# Altium PCB Copy of LineFollower.PcbDoc
Units mm, origin at the board's own origin, x right, y up, seen from the top; angles counter-clockwise.
Board outline 60 x 100.7 mm, 2 copper layers (Top Layer, Bottom Layer); 38 components, 53 nets, 184 pads, 3 vias.
Unrouted connection lines stored in the file: 54.
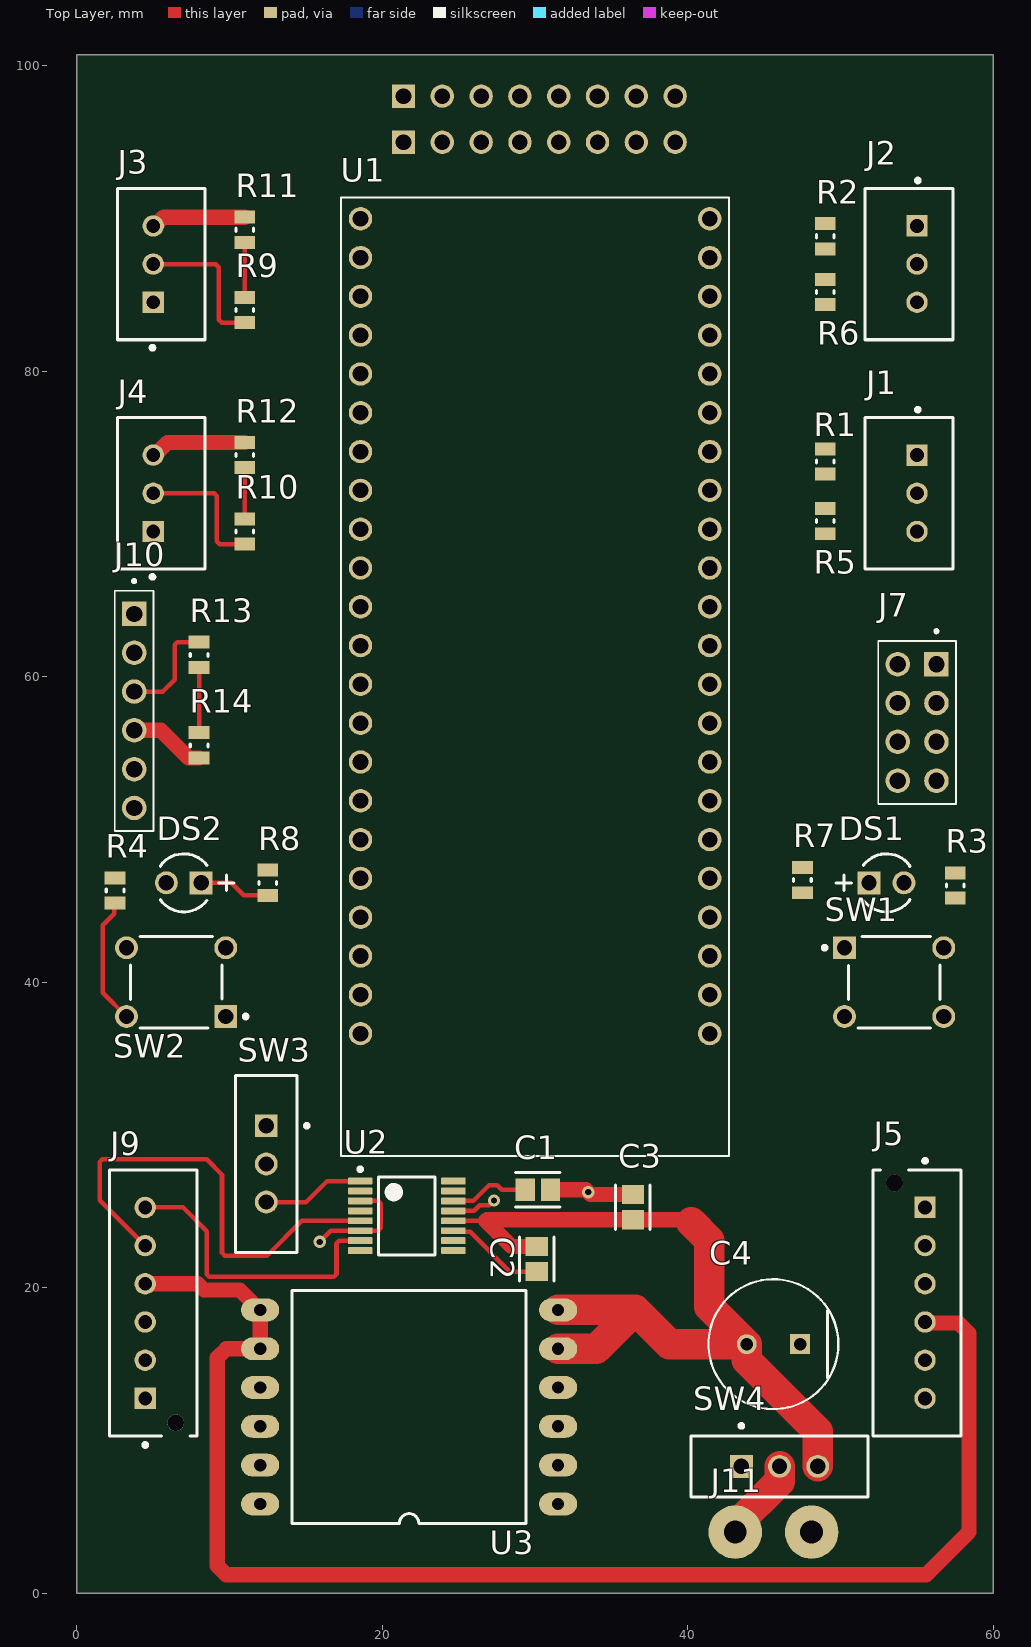
[diagram p0: Top Layer view]
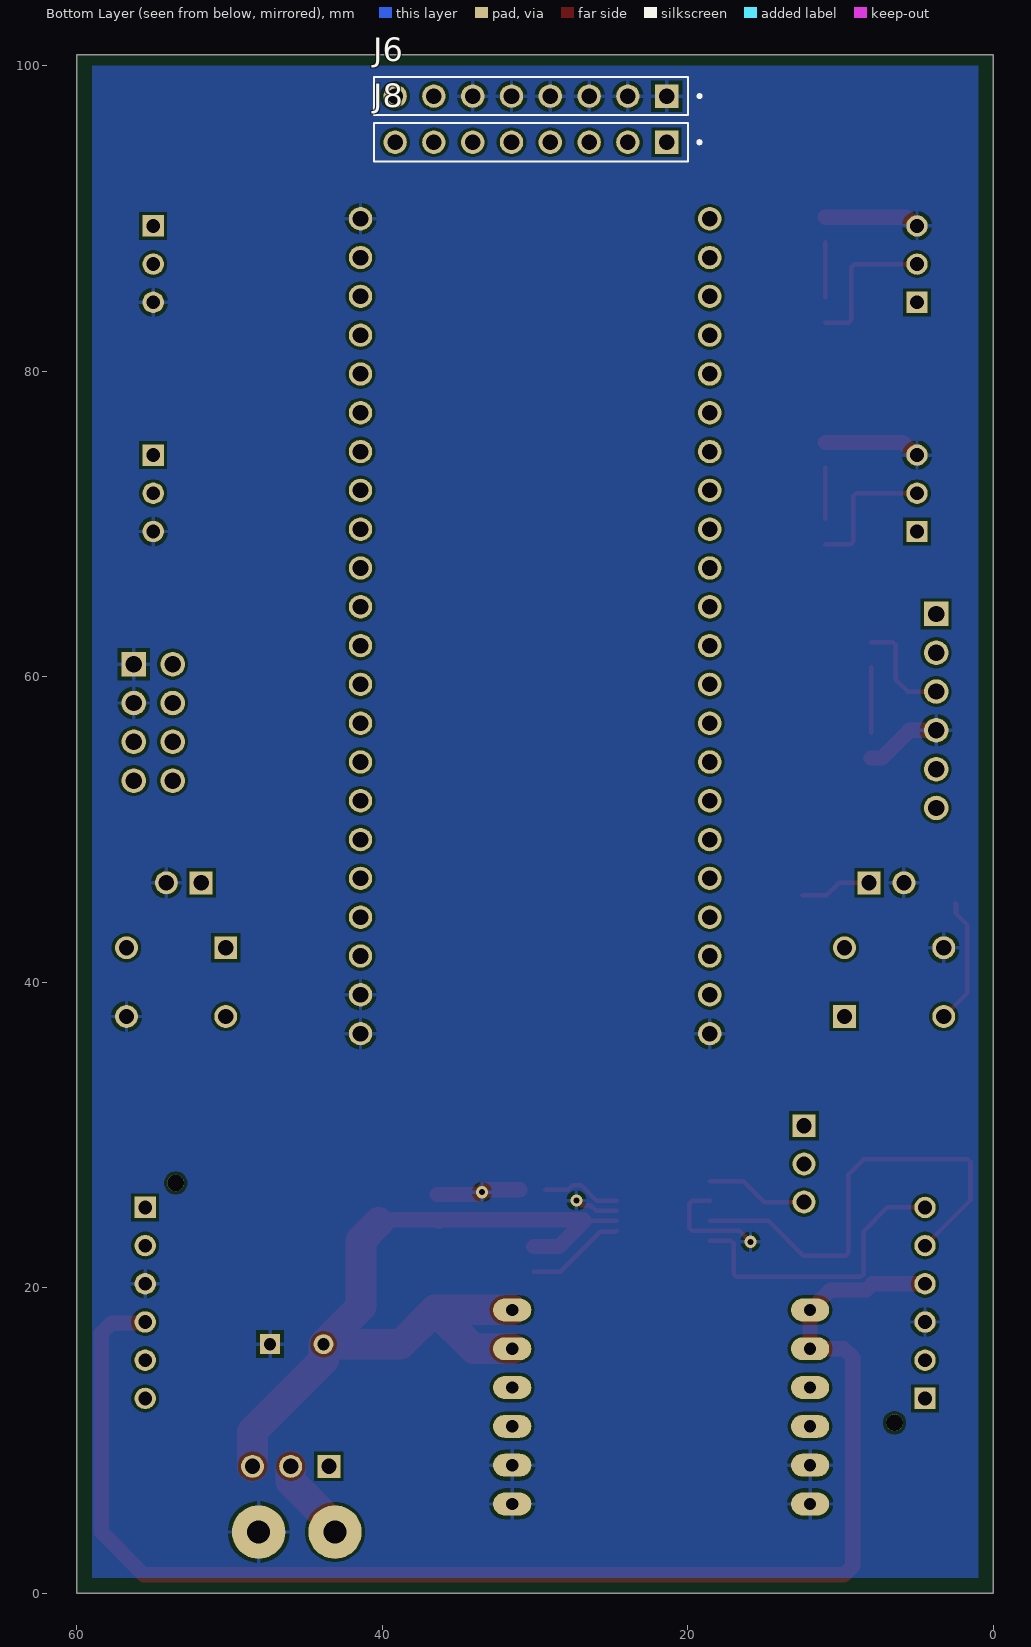
[diagram p1: Bottom Layer view, seen from below]

## Layer stack, top to bottom
Top Solder: solder mask 0.0102, Solder Resist, Dk 3.5
Top Layer: signal copper 0.0356
Dielectric 1: dielectric 0.32, FR-4, Dk 4.8
Bottom Layer: signal copper 0.0356
Bottom Solder: solder mask 0.0102, Solder Resist, Dk 3.5

## Board outline
0,0 60,0 60,100.7 0,100.7

## Design rules (kind name [scope] priority, off if disabled: settings)
Clearance [All] p1: gap=0.2 ignorepadtopadclearanceinfootprint=TRUE
PolygonConnect [All] p1: connectstyle=Relief reliefconductorwidth=0.254 reliefentries=4 polygonreliefangle="90 Angle" airgapwidth=0.254
RoutingVias [All] p1: holewidth=0.4 width=0.8 viastyle="Through Hole" minholewidth=0.4 minwidth=0.8 maxholewidth=0.4 maxwidth=0.8
SolderMaskExpansion [All] p1: expansion=0.102 istentingtop=FALSE
SupplyNets "Schematic Supply Nets_3" [InNet('3V3')] p1: voltage=0.000
SupplyNets "Schematic Supply Nets_2" [InNet('GND')] p2: voltage=0.000
SupplyNets "Schematic Supply Nets_1" [InNet('VBAT')] p3: voltage=0.000
SupplyNets "Schematic Supply Nets" [InNet('VCC')] p4: voltage=0.000
Width [All] p1: maxlimit=2.5 minlimit=0.254 preferedwidth=0.4
30 further rules are at their usual default settings.

## Components (designator, comment, footprint, x,y, rotation, side; value= is the part's Value field where it differs from the comment)
C1 "2.2uF 10V" FP-CL21-IPC_B 30.174,26.4 r0 top
C2 "0.01uF 25V" FP-CL21-IPC_B 30.1,21.874 r90 top
C3 "10uF 25V" FP-CL21-IPC_B 36.4,25.274 r270 top
C4 "EEUTA1E101" FP-RAD-TH-D_8_0_5-L_11_5-MFG 45.6,16.3 r180 top
DS1 "304090040" LED-2P-2.28-3MM 53,46.5 r0 top
DS2 "304090040" LED-2P-2.28-3MM 7,46.5 r180 top
J1 "B3B-XH-A" FP-B3B-XH-A_LF_SN-MFG 54.475,72 r270 top
J2 "B3B-XH-A" FP-B3B-XH-A_LF_SN-MFG 54.475,87 r270 top
J3 "B3B-XH-A" FP-B3B-XH-A_LF_SN-MFG 5.525,87 r90 top
J4 "B3B-XH-A" FP-B3B-XH-A_LF_SN-MFG 5.525,72 r90 top
J5 "B6B-XH-AM" FP-B6B-XH-AM_LF_SN-MFG 55,19 r90 top
J6 "HEADER 8PIN 2.54" GRAVITECH_8FX1-254MM 30.275,98 r0 bottom locked
J7 "HEADER 8PIN 2.54" SULLINS_PPPC042LFBN-RC 55,57 r90 top
J8 "HEADER 8PIN 2.54" GRAVITECH_8FX1-254MM 30.276,94.978 r0 bottom locked
J9 "B6B-XH-AM" FP-B6B-XH-AM_LF_SN-MFG 5,19 r270 top
J10 "HEADER 6PIN 2.54" SULLINS_PPTC061LFBN-RC 3.75,57.75 r270 top
J11 "BAT_CONN" PCBComponent_1 48.1,4 r180 top
R1 "1KR" RESC2013X60X30LL20T20 49,74.075 r90 top
R2 "1KR" RESC2013X60X30LL20T20 49,88.825 r90 top
R3 "10KR" RESC2013X60X30LL20T20 57.5,46.325 r90 top
R4 "10KR" RESC2013X60X30LL20T20 2.5,46 r90 top
R5 "2KR" RESC2013X60X30LL20T20 49,70.175 r90 top
R6 "2KR" RESC2013X60X30LL20T20 49,85.175 r90 top
R7 "330R" RESC2013X60X30LL20T20 47.5,46.675 r90 top
R8 "330R" RESC2013X60X30LL20T20 12.5,46.5 r90 top
R9 "1KR" RESC2013X60X30LL20T20 11,84 r270 top
R10 "1KR" RESC2013X60X30LL20T20 11,69.5 r270 top
R11 "2KR" RESC2013X60X30LL20T20 11,89.25 r270 top
R12 "2KR" RESC2013X60X30LL20T20 11,74.5 r270 top
R13 "1KR" RESC2013X60X30LL20T20 8,61.425 r90 top
R14 "2KR" RESC2013X60X30LL20T20 8,55.5 r90 top
SW1 "B3F-1000" OMRON-B3F-1000-4_V 53.5,40 r0 top
SW2 "B3F-1000" OMRON-B3F-1000-4_V 6.5,40 r180 top
SW3 "EG1218" ESWI-EG1218_V 12.4,28.1 r270 top
SW4 "EG1218" ESWI-EG1218_V 46,8.3 r0 top
U1 "ESP32-S3-DEVKITC-1U-N8" MODULE_ESP32-S3-DEVKITC-1U-N8R8 30,60 r0 top locked
U2 "DRV8833PW" PW0016A_M 21.6,24.7 r0 top
U3 "MP1584" MP1584 31.5,5.84 r180 top

## Footprints (in the part's own frame and the unit in brackets; to place one, negate y for a bottom-side part, rotate by r counter-clockwise, add the part's x,y. Pads: shape width x height; smd on the part's side, far side on the other; paste and mask are expansions set on the pad)
ESWI-EG1218_V [mm] "THD, 3-Leads, Body 11.6x4mm, Pitch 2.5mm"
  rect 1.5x1.5 hole 1: 1(-2.5,0)
  round 1.5 hole 1: 2(0,0) 3(2.5,0)
  silkscreen extent -5.8,-2 5.8,2.78, body extent -5.8,-2 5.8,2, height 7.4
FP-B3B-XH-A_LF_SN-MFG [mm]
  rect 1.4x1.4 hole 0.9 paste-2539.97 mask+0: 1(-2.5,0.525)
  round 1.4 hole 0.9 paste-2539.97 mask+0: 2(0,0.525) 3(2.5,0.525)
  silkscreen extent -5.6,-2.88 4.95,2.88, body extent -5.05,-2.98 5.05,2.98, height 0.25
FP-B6B-XH-AM_LF_SN-MFG [mm]
  rect 1.4x1.4 hole 0.9 paste-2539.97 mask+0: 1(6.25,-0.525)
  round 1.4 hole 0.9 paste-2539.97 mask+0: 2(3.75,-0.525) 3(1.25,-0.525) 4(-1.25,-0.525) 5(-3.75,-0.525) 6(-6.25,-0.525)
  round 1.1 hole 1.1 unplated paste-2539.97 mask+0: ""(7.85,1.475)
  silkscreen extent -8.7,-2.88 9.42,2.87, body extent -8.8,-2.98 8.8,2.98, height 0.25
FP-CL21-IPC_B [mm]
  rect 1.255x1.456 smd paste+0 mask+0: 1(-0.826,0) 2(0.826,0)
  silkscreen extent -1.45,-1.13 1.45,1.13, body extent -1.7,-0.98 1.7,0.98, height 0.25
FP-RAD-TH-D_8_0_5-L_11_5-MFG [mm]
  rect 1.3x1.3 hole 0.8 paste-2539.97 mask+0: 1(-1.75,0)
  round 1.3 hole 0.8 paste-2539.97 mask+0: 2(1.75,0)
  silkscreen extent -4.25,-4.25 4.25,4.25, body extent -4.35,-4.35 4.35,4.35, height 0.25
GRAVITECH_8FX1-254MM [mm]
  rect 1.53x1.53 hole 1.02: 1(-8.89,0)
  round 1.53 hole 1.02: 2(-6.35,0) 3(-3.81,0) 4(-1.27,0) 5(1.27,0) 6(3.81,0) 7(6.35,0) 8(8.89,0)
  silkscreen extent -11.13,-1.25 10.28,1.25, body extent -10.29,-1.25 10.29,1.25, height 8.65
LED-2P-2.28-3MM [mm] "LED, 2-Leads, Dia 3mm, Pitch 2.28mm"
  rect 1.5x1.5 hole 1: 1(-1.14,0)
  round 1.5 hole 1: 2(1.14,0)
  silkscreen extent -3.29,-1.9 1.52,1.9, body extent -1.9,-1.91 1.52,1.91, height 5.3
MODULE_ESP32-S3-DEVKITC-1U-N8R8 [mm]
  round 1.53 hole 1.02 mask+0.102: J1_1(-11.43,29.97) J1_2(-11.43,27.43) J1_3(-11.43,24.89) J1_4(-11.43,22.35) J1_5(-11.43,19.81) J1_6(-11.43,17.27) J1_7(-11.43,14.73) J1_8(-11.43,12.19) J1_9(-11.43,9.65) J1_10(-11.43,7.11) J1_11(-11.43,4.57) J1_12(-11.43,2.03) J1_13(-11.43,-0.51) J1_14(-11.43,-3.05) J1_15(-11.43,-5.59) J1_16(-11.43,-8.13) J1_17(-11.43,-10.67) J1_18(-11.43,-13.21) J1_19(-11.43,-15.75) J1_20(-11.43,-18.29) J1_21(-11.43,-20.83) J1_22(-11.43,-23.37) J3_1(11.43,29.97) J3_2(11.43,27.43) J3_3(11.43,24.89) J3_4(11.43,22.35) J3_5(11.43,19.81) J3_6(11.43,17.27) J3_7(11.43,14.73) J3_8(11.43,12.19) J3_9(11.43,9.65) J3_10(11.43,7.11) J3_11(11.43,4.57) J3_12(11.43,2.03) J3_13(11.43,-0.51) J3_14(11.43,-3.05) J3_15(11.43,-5.59) J3_16(11.43,-8.13) J3_17(11.43,-10.67) J3_18(11.43,-13.21) J3_19(11.43,-15.75) J3_20(11.43,-18.29) J3_21(11.43,-20.83) J3_22(11.43,-23.37)
  silkscreen extent -12.7,-31.37 12.7,31.37, body extent -12.7,-31.96 12.7,31.37, height 7.49
MP1584 [mm]
  oval 2.5x1.5 hole 0.8: 1(0,0) 2(0,-2.54) 3(0,-5.08) 4(0,-7.62) 5(0,-10.16) 6(0,-12.7) 7(19.5,-12.7) 8(19.5,-10.16) 9(19.5,-7.62) 10(19.5,-5.08) 11(19.5,-2.54) 12(19.5,0)
  silkscreen extent 2.09,-13.97 17.42,1.27
OMRON-B3F-1000-4_V [mm] "TH, 4-Leads, Body 6x6mm"
  rect 1.5x1.5 hole 1 paste-2539.97: 1(-3.25,2.25)
  round 1.5 hole 1 paste-2539.97: 2(3.25,2.25) 4(3.25,-2.25)
  round 1.5 hole 1 paste-2539.97 mask+0.102: 3(-3.25,-2.25)
  silkscreen extent -4.67,-3 3,3, body extent -3.4,-3 3.4,3, height 4.5
PCBComponent_1 [mm]
  round 3.5 hole 1.5: 1(0,0) 2(5,0)
PW0016A_M [mm] "SOP, 16-Leads, Body 5.1x4.5mm, Pitch 0.65mm, IPC Low Density"
  rrect22% 1.6x0.45 smd: 1(-3.05,2.275) 2(-3.05,1.625) 3(-3.05,0.975) 4(-3.05,0.325) 5(-3.05,-0.325) 6(-3.05,-0.975) 7(-3.05,-1.625) 8(-3.05,-2.275) 9(3.05,-2.275) 10(3.05,-1.625) 11(3.05,-0.975) 12(3.05,-0.325) 13(3.05,0.325) 14(3.05,0.975) 15(3.05,1.625) 16(3.05,2.275)
  silkscreen extent -3.17,-2.55 1.85,3.17, body extent -3.21,-2.5 3.21,2.5, height 1
RESC2013X60X30LL20T20 [mm] "Chip Resistor, 2-Leads, Body 2.00x1.25mm, IPC High Density"
  rect 0.85x1.35 smd: 1(-0.825,0) 2(0.825,0)
  silkscreen extent -0.1,-0.58 0.1,0.58, body extent -1.1,-0.72 1.1,0.72, height 0.6
SULLINS_PPPC042LFBN-RC [mm]
  rect 1.605x1.605 / inner round 1.605 / far side rect 1.605x1.605 hole 1.07: 1(3.81,-1.27)
  round 1.605 hole 1.07: 2(3.81,1.27) 3(1.27,-1.27) 4(1.27,1.27) 5(-1.27,-1.27) 6(-1.27,1.27) 7(-3.81,-1.27) 8(-3.81,1.27)
  silkscreen extent -5.33,-2.54 6.07,2.54, body extent -5.33,-2.54 5.33,2.54, height 8.51
SULLINS_PPTC061LFBN-RC [mm]
  rect 1.605x1.605 / inner round 1.605 / far side rect 1.605x1.605 hole 1.07: 1(-6.35,0)
  round 1.605 hole 1.07: 2(-3.81,0) 3(-1.27,0) 4(1.27,0) 5(3.81,0) 6(6.35,0)
  silkscreen extent -8.6,-1.27 7.87,1.27, body extent -7.87,-1.27 7.87,1.27, height 8.51

## Part data
C1 C2 C3: library part CMP-13271-004554-1, "CL21 Series 0805 10uF 25V ±20% Tolerance X5R Multilayer Ceramic Chip Capacitor", RoHS Compliant=Yes
C4: library part CMP-05427-002094-1, "Aluminum Electrolytic Capacitors (Radial Lead Type) AEC-Q200 Qualified 100uF ±20% 25V", Capacitance=100uF, Case/Package=Radial, Dielectric Material=Aluminium, ESR (Equivalent Series Resistance)=130mR, Leakage Current=25uA, Max Operating Temperature=125°C, Min Operating Temperature=-40°C, Package Quantity=200, Ripple Current=500mA, Tolerance=20%, Voltage=25V, Construction=RADIAL, Contact Plating=Tin, Diameter=8mm, Height=11.5mm, Height - Seated (Max)=0.492inch, Impedance=130mR, Lead Diameter=0.6mm, Lead Length=17mm, Lead Pitch=3.5mm, Length=11.5mm, Life (Hours)=2000Hour, Mount="Through Hole", Number of Pins=2, Packaging=Bulk, Polarity=Polar, Radiation Hardening=No, RoHS Compliant=Yes, Series=TA, Termination=Radial, Voltage Rating=25V, Voltage Rating (DC)=25V
DS1 DS2: library part CMP-007-00006-2, "Green LED, 80 mW, 20 mA, -25 to 85 degC, 2-Pin THD", Manufacturer="Shenzhen CGX", Package Description="2-Pin Through Hole Device, Dia 3 mm, Pitch 2.28 mm", Case/Package=304090040, Datasheet URL=http://datasheet.octopart.com/304090040-Chengguangxing-datasheet-62330655.pdf, Datasheet Version="Rev. 1.0, 09/2014", Manufacturer URL=http://szcgx.com/, Mounting Technology=TH, Package Reference=304090040, RoHS Compliant=Unknown
J1 J2 J3 J4: library part CMP-17439-000014-3, "CONN HEADER VERT 3POS 2.5MM", Color=Natural, Contact Resistance=20mR, Current Rating=3A, Flammability Rating="UL94 V-0", Housing Color=White, Insulation Resistance=1GR, Max Operating Temperature=85°C, Max Voltage Rating (AC)=250V, Min Operating Temperature=-25°C, Connector Type=Header, Contact Finish - Mating=TIN, Contact Material=Brass, Contact Plating=Tin, Contact Shape=Square, Contact Type="Male Pin", Depth=5.75mm, Fastening Type=Detent, Gender=Male, Housing Material=Polyamide, Insulation Color=Natural, Insulation Material=Nylon, Lead Free="Lead Free", Lead Pitch=2.5mm, Length=9.9mm, Max Current Rating=3A, Max Voltage Rating (DC)=250V, Mount="Through Hole", Number of Contacts=3, Number of Positions=3, Number of Rows=1, Orientation=Straight, Packaging=Bulk, Pitch=2.5mm, REACH SVHC="No SVHC", Series=XH, Termination=Solder, Voltage Rating=250V, Voltage Rating (AC)=250V, Wire/Cable Gauge=22AWG
J5 J9: library part CMP-17439-000167-1, "CONN HEADER VERT 6POS 2.5MM", Current Rating=3A, Flammability Rating="UL94 V-0", Insulation Color=Natural, Max Operating Temperature=85°C, Min Operating Temperature=-25°C, Voltage Rating=250V, Connector Type=Header, Contact Finish - Mating=TIN, Contact Material=Brass, Contact Plating=Copper, Contact Shape=Square, Contact Type="Male Pin", Fastening Type=Detent, Height=7mm, Insulation Material=Nylon, Length=17.4mm, Mated Stacking Heights=9.8mm, Mount="Through Hole", Number of Pins=6, Number of Poles=6, Number of Positions=6, Number of Rows=1, Packaging=Bulk, Pitch=2.5mm, Series=XH, Shape=Straight, Termination=Press-Fit, Width=5.75mm
J6 J8: library part 8FX1-254MM, "Headers & Wire Housings 2.54MM 0.1 8-PIN FEMALE HEADER", Package=None, Availability="In Stock", Check_prices=https://www.snapeda.com/parts/8Fx1-254mm/Gravitech/view-part/?ref=eda, MF=Gravitech, MP=8Fx1-254mm, Price=None, Purchase-URL=https://pricing.snapeda.com/search/part/8Fx1-254mm/?ref=eda, SnapEDA_Link=https://www.snapeda.com/parts/8Fx1-254mm/Gravitech/view-part/?ref=snap
J7: library part PPPC042LFBN-RC, "8 Position Total Dual Row 2.54 mm Pitch Straight Female Header", Package=None, Check_prices=https://www.snapeda.com/parts/PPPC042LFBNRC/Sullins/view-part/?ref=eda, MF="Sullins Connector Solutions", MP=PPPC042LFBNRC, SnapEDA_Link=https://www.snapeda.com/parts/PPPC042LFBNRC/Sullins/view-part/?ref=snap
J10: library part PPTC061LFBN-RC, "6 Position Total Single Row 2.54 mm Pitch Straight Female Header", Package=None, Check_prices=https://www.snapeda.com/parts/PPTC061LFBNRC/Sullins/view-part/?ref=eda, MF="Sullins Connector Solutions", MP=PPTC061LFBNRC, SnapEDA_Link=https://www.snapeda.com/parts/PPTC061LFBNRC/Sullins/view-part/?ref=snap
R1 R2 R3 R4 R5 R6 R7 R8 R9 R10 R11 R12 R13 R14: library part CMP-2001-02616-1, Manufacturer="KOA Speer", Part Number=SG73S2ATTD1002F
SW1 SW2: library part CMP-011-00004-2, "Tactile Switch, SPST-NO, 0.05 A, 24 V, -25 to 70 degC, 4-Pin THD, RoHS, Bulk", Contact Current Rating=50mA, Manufacturer="Omron Electronic Components", Max Contact Resistance=100mohm, Max Operating Temperature=70°C, Max Voltage Rating (DC)=24V, Min Operating Temperature=-25°C, Operating Force=100gf, Package Description="4-Pin Through Hole Device, Body 6 x 6 mm", Package Quantity=1500, Resistance=0.1Ohm, Case/Package=B3F-1000, Contact Material=Gold, Contact Plating=Gold, Current Rating=50mA, Datasheet URL=http://www.omron.com/ecb/products/pdf/en-b3f.pdf, Datasheet Version=Jan-15, Manufacturer URL=http://www.omron.com/, Max Current Rating=50mA, Mounting Technology=TH, Package Reference=B3F-1000, Packaging=Bulk, Pins=4, RoHS Compliant=True, Throw Configuration=SPST, Voltage Rating=24V, Voltage Rating (DC)=24V
SW3 SW4: library part CMP-011-00006-2, "Slide Switch, SPDT, 500 V, -20 to 70 degC, 3-Pin THD, RoHS, Bulk", Contact Current Rating=200mA, Manufacturer=E-Switch, Max Operating Temperature=70°C, Min Operating Temperature=-20°C, Operating Force=250gf, Package Description="3-Pin Through Hole Device, Body 11.6 x 4 mm, Pitch 2.5 mm", Package Quantity=1000, Voltage Rating (AC)=30V, Case/Package=EG1218, Contact Finish=Silver, Contact Material=Copper, Contact Plating=Silver, Current Rating=200mA, Datasheet URL=https://www.e-switch.com/system/asset/product_line/data_sheet/119/EG.pdf, Datasheet Version=Oct-15, Manufacturer URL=http://www.e-switch.ch/en/, Mounting Technology=TH, Package Reference=EG1218, Packaging=Bulk, Pins=3, RoHS Compliant=True, Throw Configuration=SPDT, Voltage Rating (DC)=30V
U1: library part ESP32-S3-DEVKITC-1U-N8R8, "The ESP32-S3-DEVKITC-1U-N8R8 from Espressif Systems is an evaluation board designed for wireless communication applications. It features a 32-bit Xtensa dual-core processor running at 240MHz, providing strong processing power for complex tasks. The board", Package=None, Check_prices=https://www.snapeda.com/parts/ESP32-S3-DEVKITC-1U-N8R8/Espressif+Systems/view-part/?ref=eda, MF="Espressif Systems", MP=ESP32-S3-DEVKITC-1U-N8R8, SnapEDA_Link=https://www.snapeda.com/parts/ESP32-S3-DEVKITC-1U-N8R8/Espressif+Systems/view-part/?ref=snap
U2: library part CMP-1529-00002-2, "2 A Low Voltage Dual Brushed DC or Single Bipolar Stepper Motor Driver (PWM Ctrl), 2.7 to 10.8 V, -40 to 85 degC, 16-Pin SOP (PW), Green (RoHS & no Sb/Br), Tube", Manufacturer="Texas Instruments", Package Reference=PW0016A, Peak Output Current="2 A", RMS Output Current="1.5 A", Temperature Range="-40 to 85 degC", ComponentLink1Description="Manufacturer URL", ComponentLink1URL=www.ti.com, ComponentLink2Description=Datasheet, ComponentLink2URL=http://www.ti.com/lit/ds/symlink/drv8833.pdf, ComponentLink3Description="Package Specification", ComponentLink3URL=http://www.ti.com/lit/ml/mpds361/mpds361.pdf, Control I/F=PWM, DatasheetVersion=SLVSAR1D, Eco-Plan="Green (RoHS & no Sb/Br)", Mounting Technology="Surface Mount", PackageDescription="16-Pin Plastic Small Outline, Body 4.4 x 5 mm, Pitch 0.65 mm", PackageVersion=4040064-4/G, Packing=Tube, PartNumber=DRV8833PW, rDS (ON) (LS + HS)="360 mOhms", Vs="2.7 V Min."

## Via types
v1: diameter 0.8, hole 0.4, Top Layer to Bottom Layer, 3 vias

## Nets (pads, with @x,y where several pads share a name; then routed paths per layer and width w, separated by ;. In a path a pad name is that pad's centre, name@x,y a point inside that pad or via, vN(x,y) a via of type N, cw(c..) or ccw(c..) an arc to the next point about the centre after c; other vN are vias at no path point)
3V3: J6.7 J7.5 R3.2 R4.2 U1.J1_1 U1.J1_2
GND: C1.2 C3.1 C4.1 DS1.2 DS2.2 J1.3 J2.3 J3.3 J4.3 J5.3 J6.1 J6.2 J6.3 J6.4 J6.5 J6.6 J7.1 J7.3 J9.3 J10.4 J11.1 R5.1 R6.1 R11.1 R12.1 R14.1 SW1.4 SW2.4 U1.J1_22 U1.J3_1 U1.J3_21 U1.J3_22 U2.3 U2.6 U2.13 U3.1 U3.2 U3.11 U3.12 | length 33.4
  Top Layer w0.3: v1(15.9,23) 16.625,23.725 U2.6 ; U2.3 19.724,25.675 19.9,25.499 19.9,23.902 19.724,23.726 U2.6@18.551,23.726 ; U2.13 26.013,25.025 26.388,25.4 27,25.4 v1(27.3,25.7)
  Top Layer w1: J10.4 5.501,56.48 7.306,54.675 R14.1 ; J4.3 5.108,74.5 5.933,75.325 R12.1 ; J3.3 5.108,89.5 5.683,90.075 R11.1 ; C1.2 33.327,26.4 v1(33.477,26.25) 33.627,26.1 33.7,26.1 C3.1
IO0: SW1.1 U1.J3_14
IO1: J8.1 U1.J3_4
IO2: J8.2 U1.J3_5
IO3: J7.4 U1.J1_13
IO4: J8.3 U1.J1_4
IO5: J8.4 U1.J1_5
IO6: J8.5 U1.J1_6
IO7: J8.6 U1.J1_7
IO8: J8.7 U1.J1_12
IO9: J8.8 U1.J1_15
IO10: J6.8 U1.J1_16
IO11: R1.1 R5.2 U1.J1_17
IO12: R10.1 R12.2 U1.J1_18 | length 3.4
  Top Layer w0.3: R10.1 R12.2
IO13: R9.1 R11.2 U1.J1_19 | length 3.6
  Top Layer w0.3: R9.1 R11.2
IO14: R2.1 R6.2 U1.J1_20
IO15: R7.2 U1.J1_8
IO16: R8.2 U1.J1_9
IO17: R13.1 R14.2 U1.J1_10 | length 4.3
  Top Layer w0.3: R14.2 R13.1
IO18: J10.2 U1.J1_11
IO21: J5.2 U1.J3_18
IO40: J7.2 U1.J3_8
IO41: J5.1 U1.J3_7
IO42: SW2.1 U1.J3_6
IO45: J7.6 U1.J3_15
IO46: J7.8 U1.J1_14
IO47: J9.2 U1.J3_17
IO48: J9.1 U1.J3_16
NetC1_1: C1.1 U2.14 | length 5.2
  Top Layer w0.3: U2.14 25.955,25.675 26.98,26.7 27.526,26.7 27.826,26.4 C1.1
NetC2_1: C2.1 U2.11 | length 6.6
  Top Layer w0.3: U2.11 24.725,23.65 25.748,23.65 28.349,21.048 C2.1
NetDS1_1: DS1.1 R7.1
NetDS2_1: DS2.1 R8.1 | length 4.7
  Top Layer w0.3: DS2.1 10.1,46.5 10.925,45.675 R8.1
NetJ1_2: J1.2 R1.2
NetJ2_2: J2.2 R2.2
NetJ3_2: J3.2 R9.2 | length 9.6
  Top Layer w0.3: J3.2 9.1,87 9.3,86.8 9.3,83.351 9.476,83.175 R9.2
NetJ4_2: J4.2 R10.2 | length 9.1
  Top Layer w0.3: J4.2 8.993,72 9.168,71.824 9.168,68.851 9.344,68.675 R10.2
NetJ5_5: J5.5 U2.4
NetJ5_6: J5.6 U2.2
NetJ9_5: J9.5 U2.5 | length 30.4
  Top Layer w0.3: J9.5 1.5,25.725 1.5,28.224 1.676,28.4 8.5,28.4 9.5,27.4 9.5,22.276 9.676,22.1 12.45,22.1 14.725,24.375 U2.5
NetJ9_6: J9.6 U2.7 | length 19.8
  Top Layer w0.3: J9.6 6.95,25.25 8.5,23.7 8.5,20.876 8.676,20.7 16.824,20.7 17,20.876 17,22.899 17.176,23.075 U2.7
NetJ10_3: J10.3 R13.2 | length 6.9
  Top Layer w0.3: J10.3 5.62,59.02 6.4,59.8 6.4,62.074 6.576,62.25 R13.2
NetJ11_2: J11.2 SW4.2 | length 5.5
  Top Layer w2: J11.2 43.1,4.406 46,7.306 SW4.2
NetR3_1: R3.1 SW1.2
NetR4_1: R4.1 SW2.2 | length 8.4
  Top Layer w0.3: R4.1 2.452,45.127 2.452,44.476 1.7,43.724 1.7,39.3 SW2.2
NetSW3_2: SW3.2 U1.J3_9
NetSW3_3: SW3.3 U2.1 | length 6.7
  Top Layer w0.3: SW3.3 15,25.6 16.375,26.975 U2.1
NetU1_J3_10: U1.J3_10 U2.10
NetU1_J3_11: U1.J3_11 U2.9
NetU1_J3_12: U1.J3_12 U2.15
NetU1_J3_13: U1.J3_13 U2.16
VBAT: C2.2 C3.2 C4.2 SW4.3 U2.12 U3.5 U3.6 | length 58.3
  Top Layer w0.3: U2.12 26.775,24.375
  Top Layer w1: 26.775,24.375 28.45,22.7 C2.2 ; 26.848,24.448 36.172,24.448 C3.2@36.273,24.348 ; C3.2 40.053,24.448 40.228,24.273
  Top Layer w2: U3.5 34.015,16 36.555,18.54 ; U3.6 36.555,18.54 ; 40.228,24.273 41.4,23.101 41.4,18.75 C4.2 ; SW4.3 48.5,10.6 43.85,15.25 C4.2 ; 36.555,18.54 38.795,16.3 C4.2
VCC: J1.1 J2.1 J3.1 J4.1 J5.4 J7.7 J9.4 J10.5 U1.J1_21 U3.7 U3.8 | length 94.4
  Top Layer w1: J9.4 7.924,20.25 8.324,19.85 10.664,19.85 11.404,19.11 11.404,18.771 11.635,18.54 U3.7 U3.8 9.786,16 9.2,15.414 9.2,1.786 9.786,1.2 55.6,1.2 58.4,4 58.4,17.014 57.725,17.689 55.586,17.689 J5.4
pads on no net: J5. J9. J10.1 J10.6 SW1.3 SW2.3 SW3.1 SW4.1 U1.J1_3 U1.J3_2 U1.J3_3 U1.J3_19 U1.J3_20 U2.8 U3.3 U3.4 U3.9 U3.10

## Polygon pours and split planes (outlines as drawn)
GND on Bottom Layer "GND_L02_P004" (solid, pour order 4): 1,100 59,100 59,1 1,1

## Text inside footprints (layer, text, board x,y; h text height)
U1: Top 3D Body "J3" at 38.25,89.5 h1.27; Top 3D Body "J1" at 20,89.5 h1.27